# Altium PCB senoko_pvt1.PcbDoc (part 1 of 3)
Units mil, origin at the board's own origin, x right, y up, seen from the top; angles counter-clockwise.
Board outline 4901.58 x 1614.17 mil, 4 copper layers (Top Layer, Internal Plane 1, Internal Plane 2, Bottom Layer), stack 65.8 mil thick; 226 components, 139 nets, 941 pads, 366 vias.
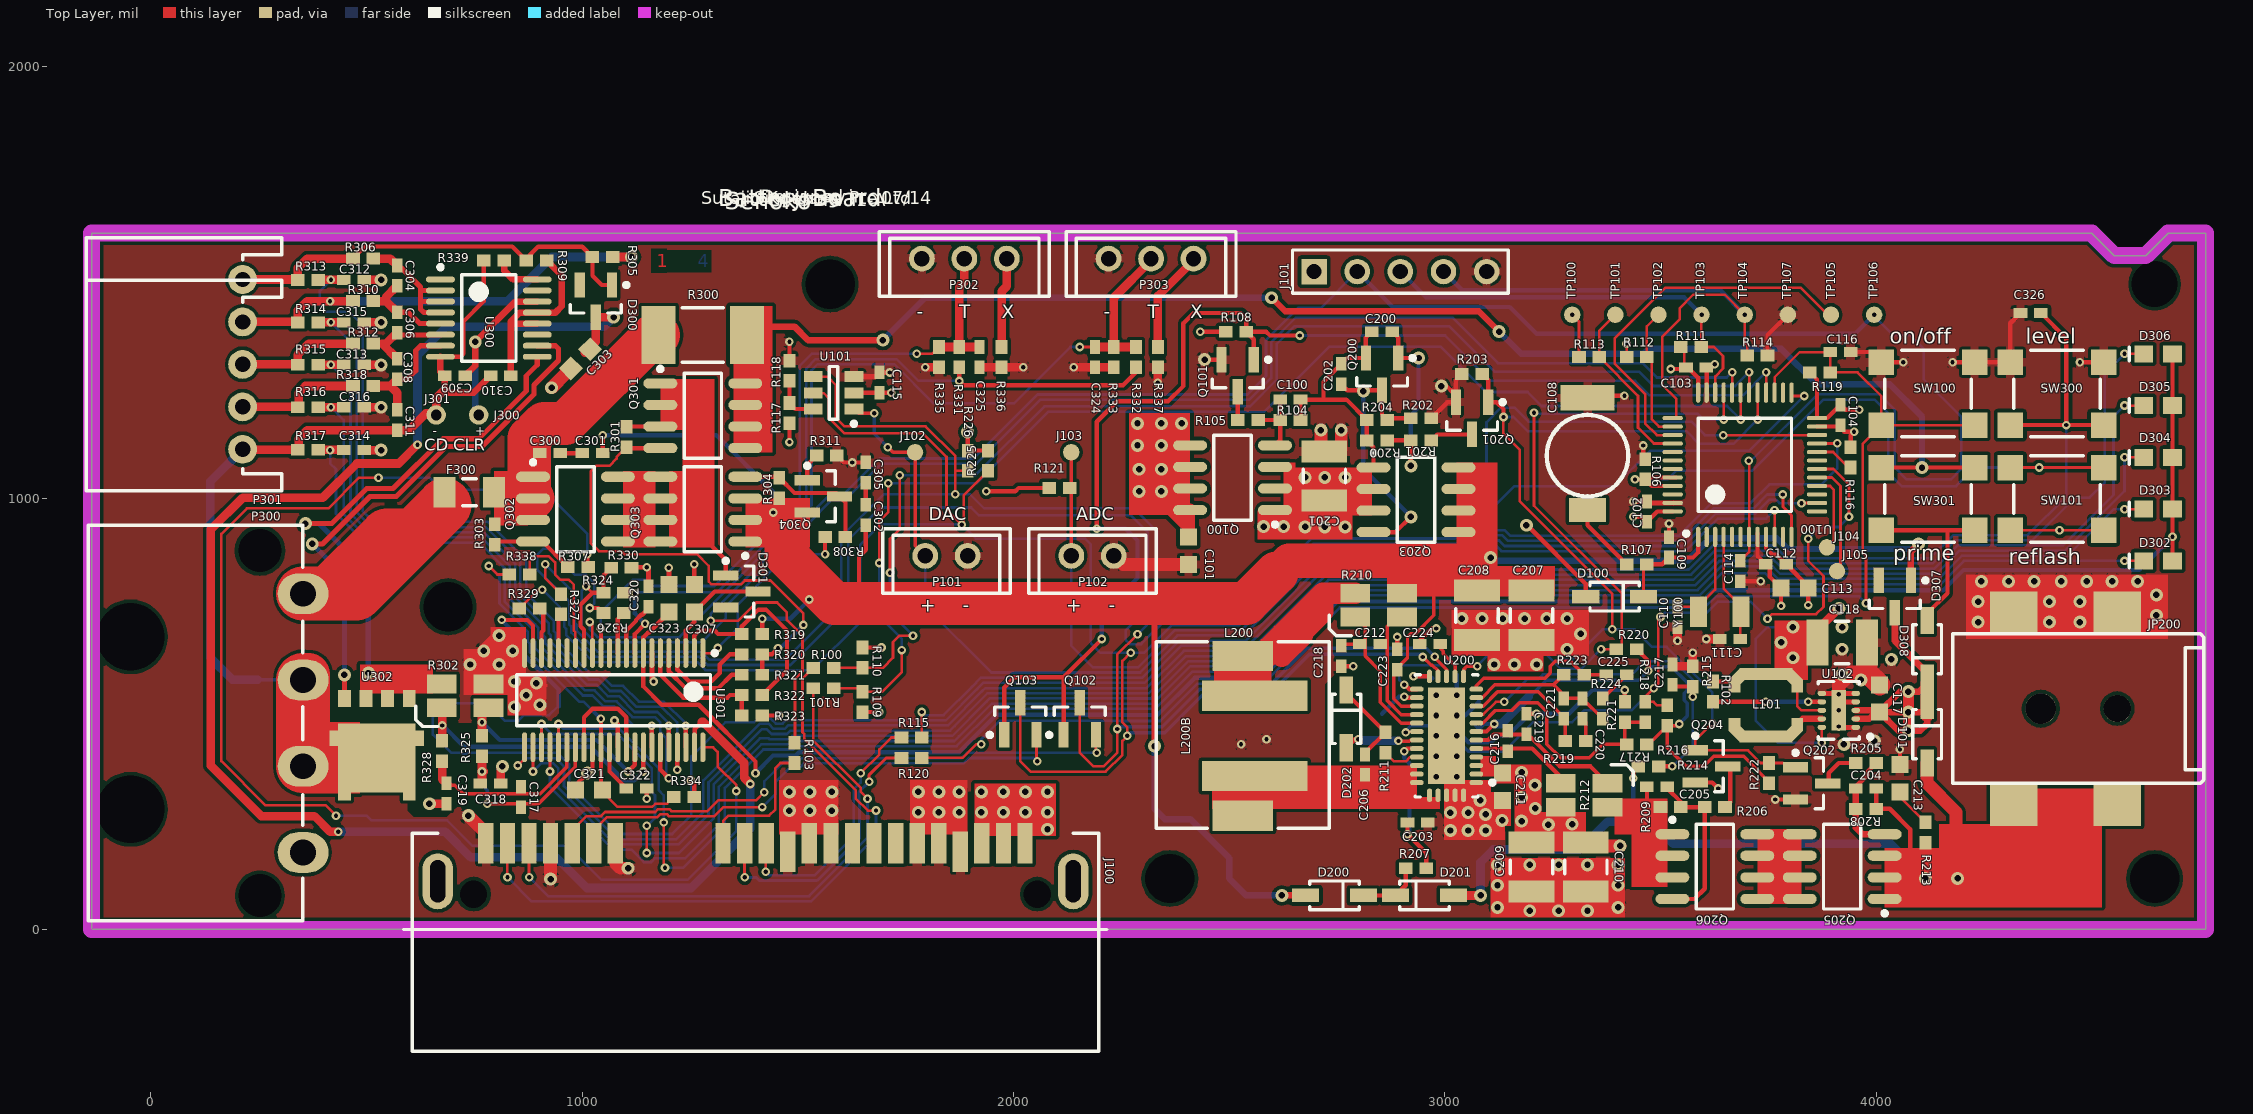
[diagram p0: Top Layer view]
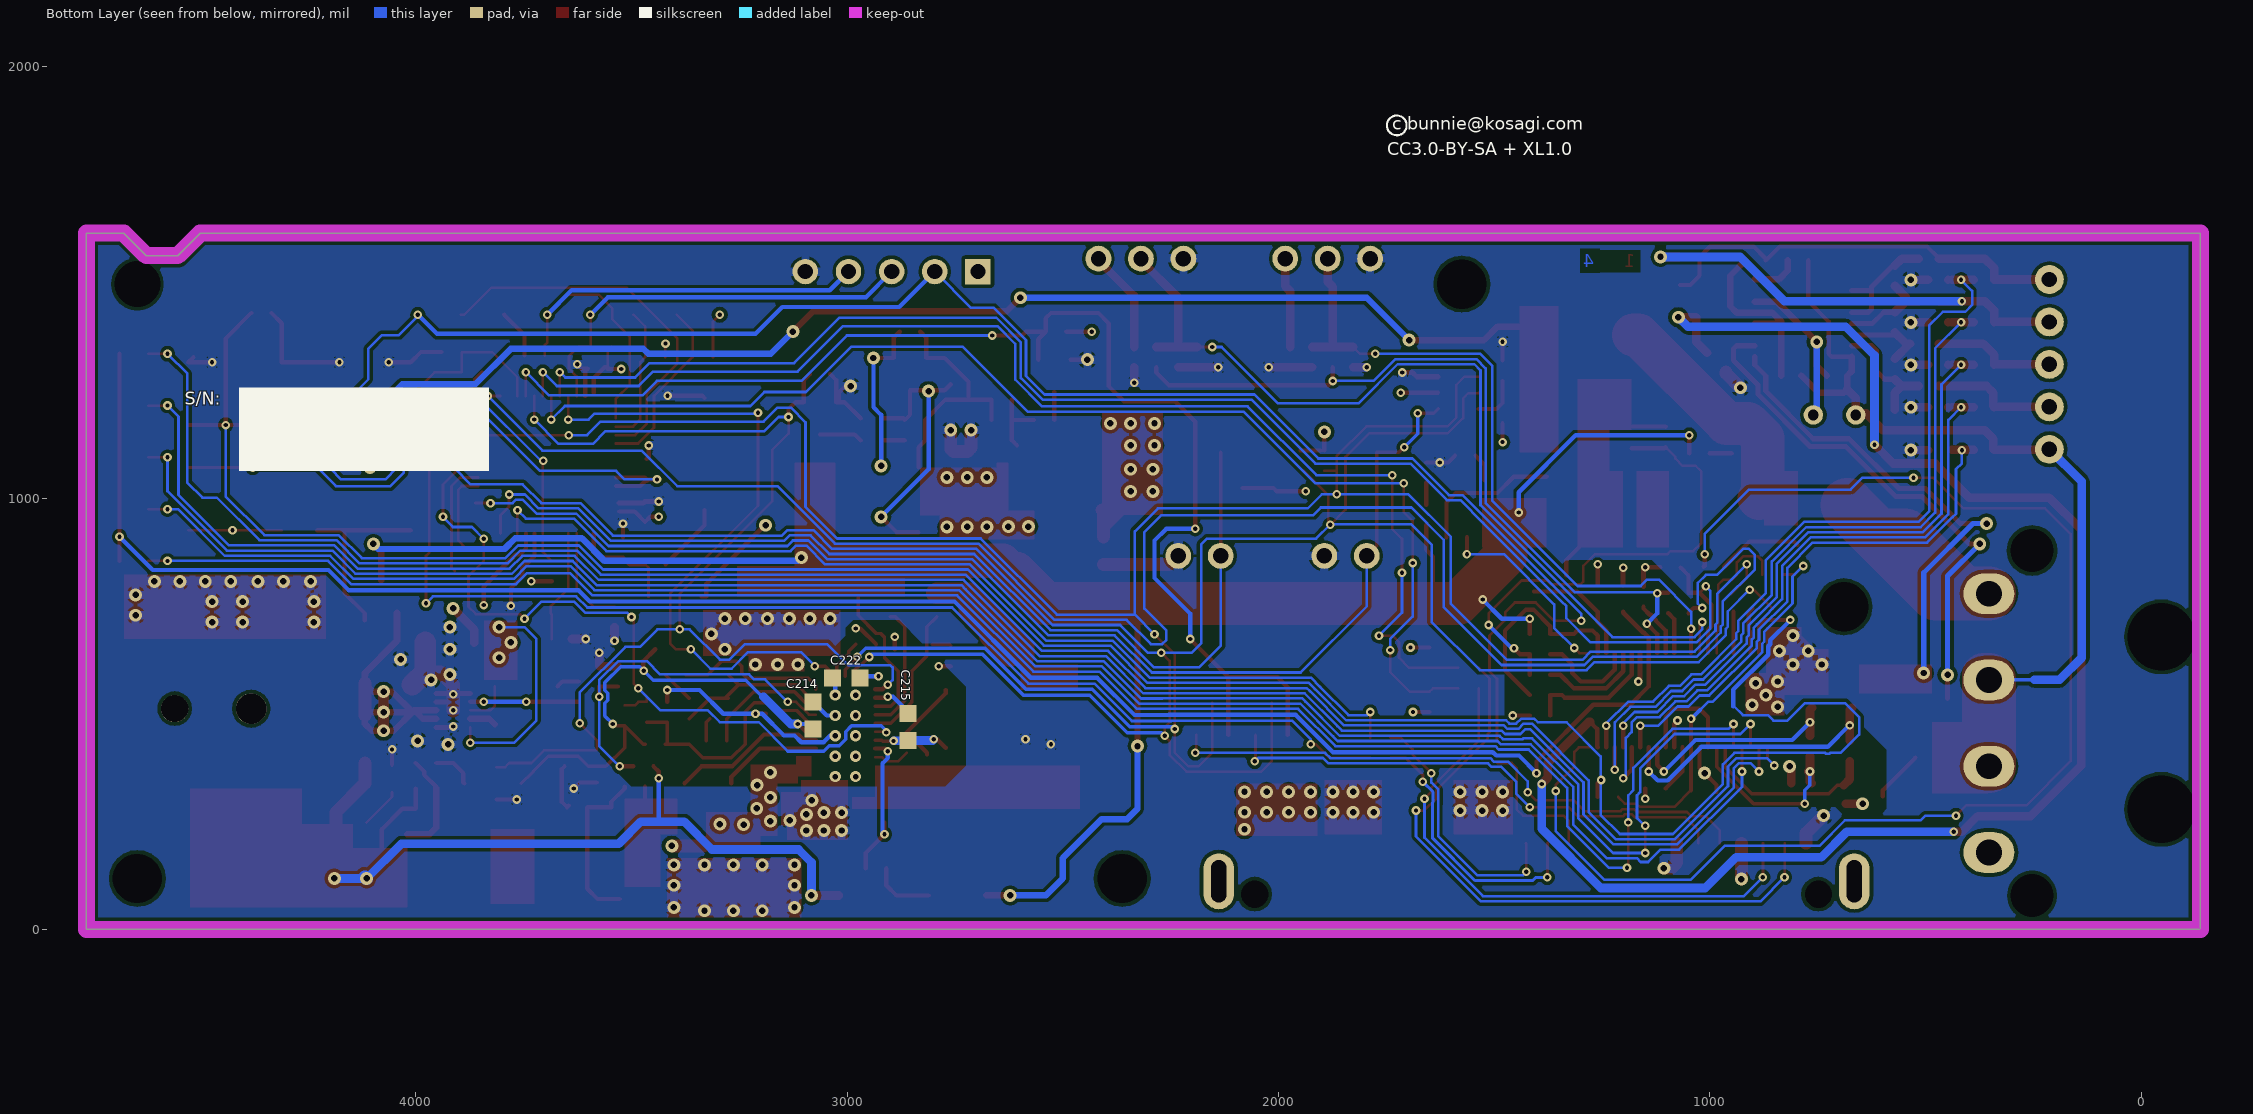
[diagram p1: Bottom Layer view, seen from below]
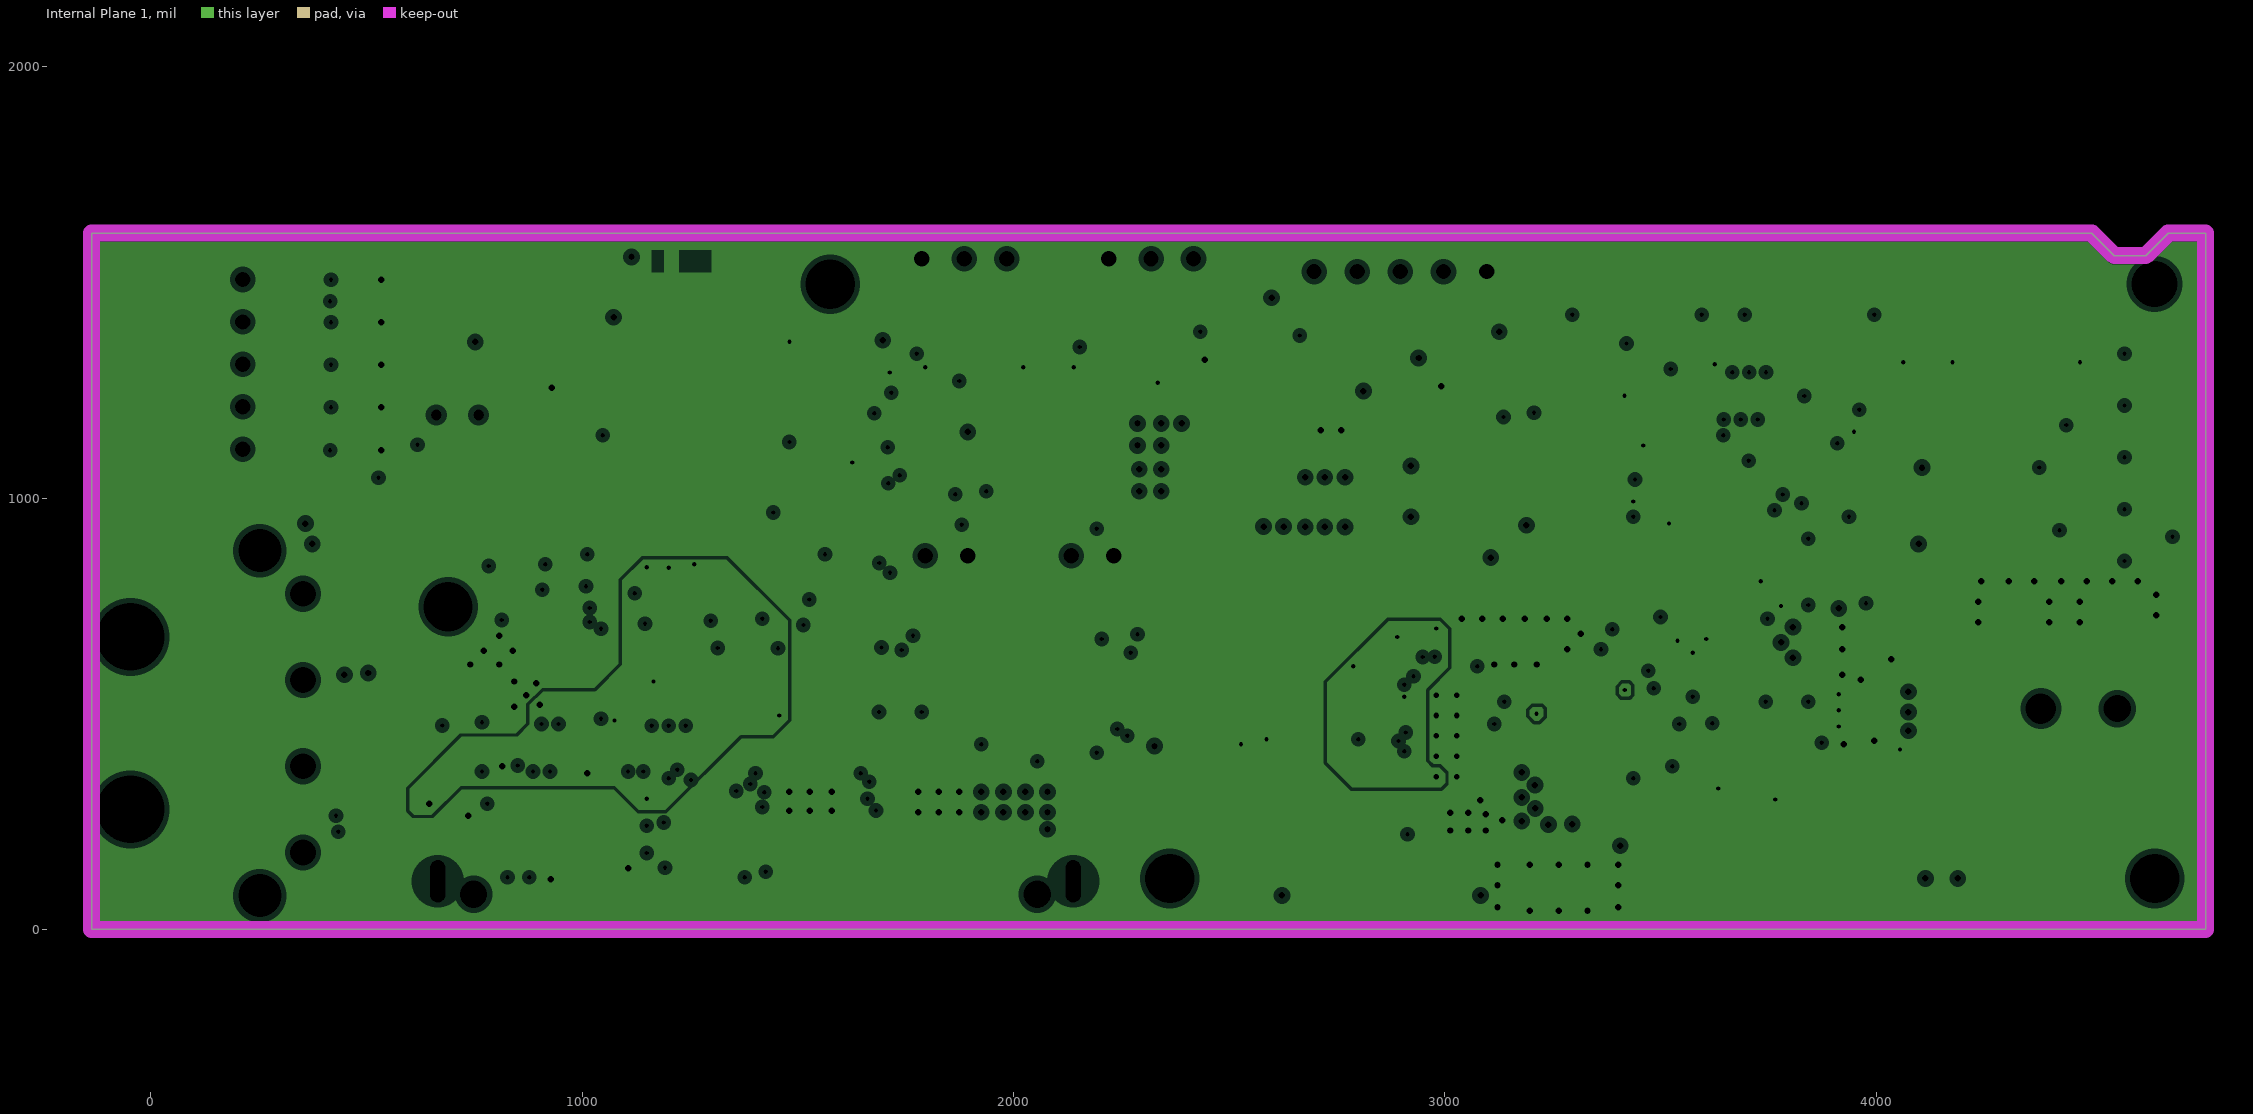
[diagram p2: Internal Plane 1, clearances drawn from the general rule]
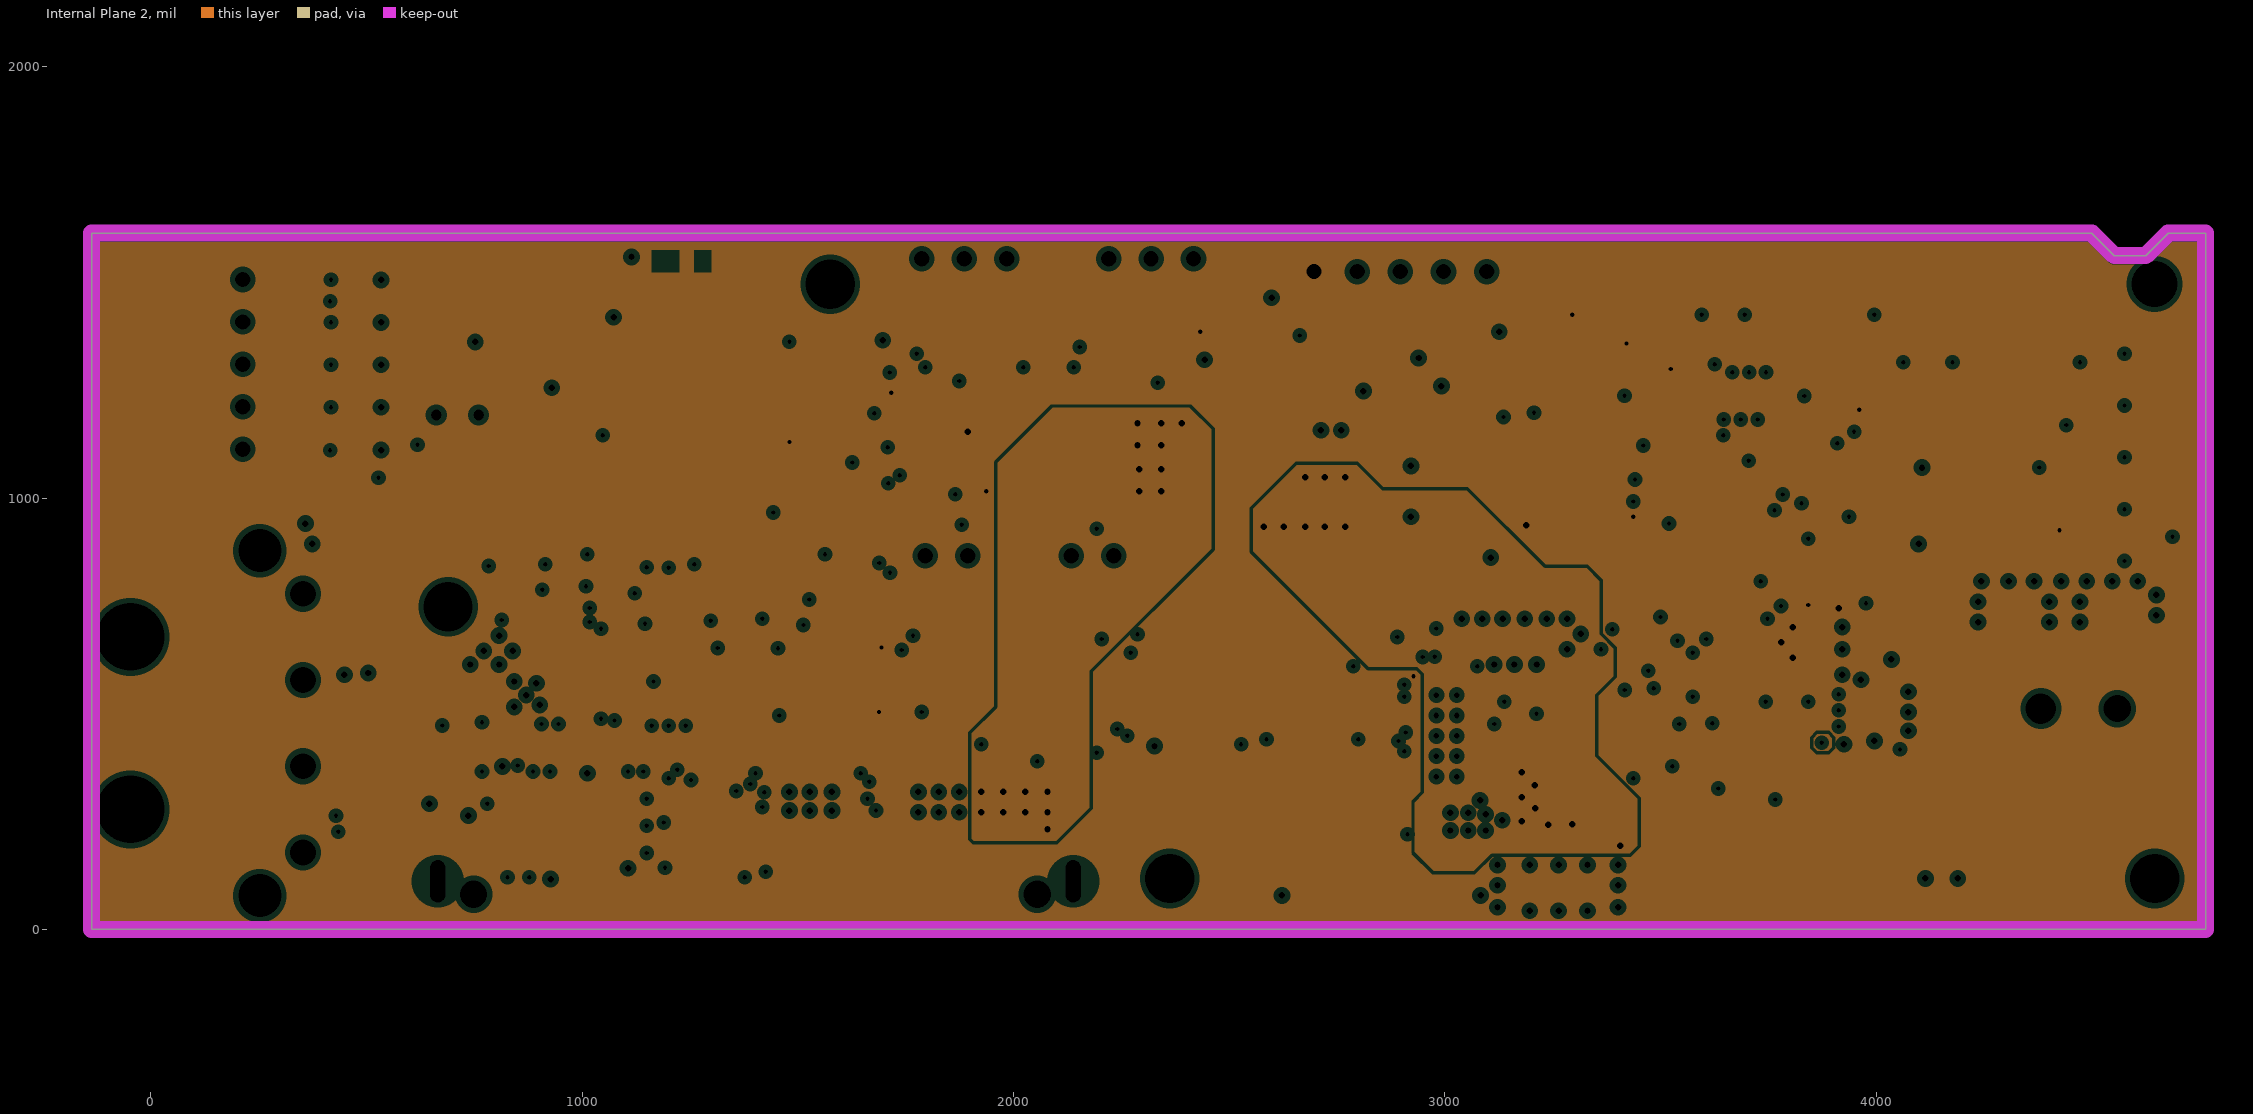
[diagram p3: Internal Plane 2, clearances drawn from the general rule]

## Layer stack, top to bottom
Top Solder: solder mask 0.4, Solder Resist, Dk 3.5
Top Layer: signal copper 1.4
Dielectric1: core 12.6, FR-4, Dk 4.8
Internal Plane 1: plane copper 1.4, net GND
Dielectric2: prepreg 35, FR-4, Dk 4.8
Internal Plane 2: plane copper 1.4, net (Multiple Nets)
Dielectric3: core 12.6, FR-4, Dk 4.8
Bottom Layer: signal copper 1.4
Bottom Solder: solder mask 0.4, Solder Resist, Dk 3.5

## Board outline
-137.8,0 -137.8,1614.17 4500,1614.17 4552.17,1562.01 4625,1562.01 4677.17,1614.17 4763.78,1614.17 4763.78,0

## Design rules (kind name [scope] priority, off if disabled: settings)
Clearance Clearance_poly [InPoly] p1: gap=8 ignorepadtopadclearanceinfootprint=FALSE except(0: Arc-Hole Track-Hole SMDPad-Hole THPad-Hole Via-Hole Fill-Hole Poly-Hole Region-Hole Text-Hole)
Clearance Clearance_NPTH [PadIsPlated = 'False'] p2: gap=12 ignorepadtopadclearanceinfootprint=FALSE except(0: Arc-Hole Track-Hole SMDPad-Hole THPad-Hole Via-Hole Fill-Hole Poly-Hole Region-Hole Text-Hole)
Clearance [All] p3: gap=6 ignorepadtopadclearanceinfootprint=FALSE except(0: Arc-Hole Track-Hole SMDPad-Hole THPad-Hole Via-Hole Fill-Hole Poly-Hole Region-Hole Text-Hole)
ComponentClearance [All] p1 off: gap=10 collisioncheckmode=3 verticalgap=10 showdistances=FALSE
Height [All] p1 off: minheight=0 maxheight=1000 prefheight=500
HoleSize [All] p1: absolutevalues=TRUE maxlimit=175 minlimit=1 maxpercent=80.000 minpercent=20.000
MinimumSolderMaskSliver [All] p1 off: minsoldermaskwidth=10
PlaneClearance PlaneClearance_M2.5 [(AsMM(HoleSize) = 2.9) or (AsMM(HoleSize) = 2.7)] p1: clearance=43.31
PlaneClearance [All] p2: clearance=12
PlaneConnect [All] p1: planeconnectstyle=Direct reliefexpansion=20 reliefentries=4 reliefconductorwidth=10 reliefairgap=10
PolygonConnect [All] p1: connectstyle=Relief reliefconductorwidth=20 reliefentries=4 polygonreliefangle="90 Angle" airgapwidth=6
RoutingVias [All] p1: holewidth=15 width=30 viastyle="Through Hole" minholewidth=10 minwidth=20 maxholewidth=15 maxwidth=30
SilkToSilkClearance [All] p1 off: silktosilkclearance=10
SilkToSolderMaskClearance SilkscreenOverComponentPads [IsPad] p1 off: minsilkscreentomaskgap=10 clearancetoexposedcopper=TRUE
SolderMaskExpansion [All] p1: expansion=2.76
Width [All] p1: maxlimit=200 minlimit=6 preferedwidth=8 minimp=50.000000 maximp=50.000000 favimp=50.000000
22 further rules are at their usual default settings.

## Components (designator, comment, footprint, x,y, rotation, side; value= is the part's Value field where it differs from the comment)
C100 "10nF, X7R, 50V 10%" CAPC1005N 2641.73,1228.35 r180 top
C101 "2.2uF, 25V, 10% X5R" CAPC1608N 2405.51,877.95 r270 top
C102 "0.1uF, 25V, X5R" CAPC1005N 3468.5,968.5 r90 top
C103 "0.1uF, 25V, X5R" CAPC1005N 3582.68,1303.15 r0 top
C104 "0.1uF, 25V, X5R" CAPC1005N 3917.32,1192.91 r270 top
C108 "0.06F 3.3V coin supercap" TAIYO_YUDEN_PAS414HR-VA5R 3330.71,1098.43 r90 top
C109 "0.1uF, 25V, X5R" CAPC1005N 3519.69,885.83 r90 top
C110 "6.8pF, NP0" CAPC1005N 3539.37,724.41 r270 top
C111 "6.8pF, NP0" CAPC1005N 3661.42,673.23 r180 top
C112 "10nF, X7R, 50V 10%" CAPC1005N 3767.72,846.46 r0 top
C113 "1.0uF, 25V, 20% X5R" CAPC1608N 3811.02,791.34 r0 top
C114 "0.1uF, 25V, X5R" CAPC1005N 3685.04,830.71 r270 top
C115 "0.1uF, 25V, X5R" CAPC1005N 1688.98,1267.72 r90 top
C116 "0.1uF, 25V, X5R" CAPC1005N 3917.32,1338.58 r180 top
C117 "2.2uF, 25V, 10% X5R" CAPC1608N 4007.87,535.43 r90 top
C118 "22uF, 25V, X5R, 10%" CAPC3225N 3921.26,665.35 r0 top
C200 "DNP" CAPC1005N 2854.33,1385.83 r180 top
C201 "22uF, 25V, X5R, 10%" CAPC3225N 2720.47,1051.18 r90 top
C202 "0.1uF, 25V, X5R" CAPC1005N 2759.84,1287.4 r270 top
C203 "0.1uF, 25V, X5R" CAPC1005N 2937.01,248.03 r0 top
C204 "0.1uF, 25V, X5R" CAPC1005N 3976.38,326.77 r0 top
C205 "10nF, X7R, 50V 10%" CAPC1005N 3492.13,330.71 r180 top
C206 "0.1uF, 25V, X5R" CAPC1005N 2814.96,381.89 r270 top
C207 "22uF, 25V, X5R, 10%" CAPC3225N 3200.79,728.35 r270 top
C208 "22uF, 25V, X5R, 10% (DNP)" CAPC3225N 3074.8,728.35 r270 top
C209 "22uF, 25V, X5R, 10%" CAPC3225N 3200.79,144.69 r270 top
C210 "22uF, 25V, X5R, 10% (DNP)" CAPC3225N 3326.77,144.69 r270 top
C211 "1.0uF, 25V, 20% X5R" CAPC1608N 3133.86,330.71 r270 top
C212 "0.1uF, 25V, X5R" CAPC1005N 2826.77,661.42 r180 top
C213 "2.2uF, 25V, 10% X5R" CAPC1608N 4055.12,350.39 r90 top
C214 "1.0uF, 25V, 20% X5R" CAPC1608N 3078.74,496.06 r90 bottom
C215 "1.0uF, 25V, 20% X5R" CAPC1608N 2859.25,469.49 r90 bottom
C216 "0.1uF, 25V, X5R" CAPC1005N 3145.67,437.01 r270 top
C217 "10nF, X7R, 50V 10%" CAPC1005N 3527.56,590.55 r90 top
C218 "0.1uF, 25V, X5R" CAPC1005N 2759.84,633.86 r90 top
C219 "0.1uF, 25V, X5R" CAPC1005N 3188.98,476.38 r90 top
C220 "2.2nF, X7R, 10%" CAPC1005N 3318.9,511.81 r90 top
C221 "51pF, NP0" CAPC1005N 3275.59,511.81 r90 top
C222 "1.0uF, 25V, 20% X5R" CAPC1608N 3001.97,582.68 r0 bottom
C223 "0.1uF, 25V, X5R" CAPC1005N 2889.76,625.98 r270 top
C224 "100pF, NP0" CAPC1005N 2965.55,661.42 r180 top
C225 "130pF, NP0" CAPC1005N 3397.64,590.55 r180 top
C300 "0.1uF, 25V, X5R" CAPC1005N 925.2,1104.33 r180 top
C301 "0.1uF, 25V, X5R" CAPC1005N 1023.62,1104.33 r180 top
C302 "0.1uF, 25V, X5R" CAPC1005N 1657.48,960.63 r270 top
C303 "1.0uF, 25V, 20% X5R" CAPC1608N 996.06,1322.83 r225 top
C304 "0.1uF, 25V, X5R" CAPC1005N 570.87,1515.75 r270 top
C305 "0.1uF, 25V, X5R" CAPC1005N 1657.48,1059.06 r270 top
C306 "0.1uF, 25V, X5R" CAPC1005N 570.87,1407.48 r270 top
C307 "1.0uF, 25V, 20% X5R" CAPC1608N 1259.84,767.72 r90 top
C308 "0.1uF, 25V, X5R" CAPC1005N 570.87,1299.21 r270 top
C309 "0.22uF, 25V, X5R" CAPC1005N 704.72,1283.46 r180 top
C310 "0.1uF, 25V, X5R" CAPC1005N 811.02,1283.46 r180 top
C311 "0.1uF, 25V, X5R" CAPC1005N 570.87,1181.1 r270 top
C312 "0.1uF, 25V, X5R" CAPC1005N 470.47,1505.91 r0 top
C313 "0.1uF, 25V, X5R" CAPC1005N 470.47,1309.06 r0 top
C314 "0.1uF, 25V, X5R" CAPC1005N 470.47,1111.22 r0 top
C315 "0.1uF, 25V, X5R" CAPC1005N 470.47,1407.48 r0 top
C316 "0.1uF, 25V, X5R" CAPC1005N 470.47,1210.63 r0 top
C317 "0.1uF, 25V, X5R" CAPC1005N 858.27,307.09 r90 top
C318 "0.1uF, 25V, X5R" CAPC1005N 787.4,338.58 r0 top
C319 "0.1uF, 25V, X5R" CAPC1005N 685.04,314.96 r270 top
C320 "0.1uF, 25V, X5R" CAPC1005N 1153.54,771.65 r90 top
C321 "1.0uF, 25V, 20% X5R" CAPC1608N 1015.75,322.83 r180 top
C322 "0.1uF, 25V, X5R" CAPC1005N 1125.98,326.77 r0 top
C323 "10uF, 10V, X5R, 20%" CAPC1608N 1200.79,767.72 r90 top
C324 "0.47uF, 16V, X5R" CAPC1005N 2188.98,1326.77 r270 top
C325 "0.47uF, 16V, X5R" CAPC1005N 1921.26,1326.77 r270 top
C326 "0.1uF, 25V, X5R" CAPC1005N 4358.27,1429.13 r180 top
D100 "BAT54T1G" SOD123 3393.7,771.65 r0 top
D101 "BAT54T1G" SOD123 4118.11,452.76 r90 top
D200 "BAT54T1G" SOD123 2744.09,78.74 r0 top
D201 "BAT54T1G" SOD123 2952.76,78.74 r180 top
D202 "BAT54T1G" SOD123 2771.65,488.19 r90 top
D300 "BAS16" SOT23-3N 1031.5,1456.69 r270 top
D301 "BAS16" SOT23-3N 1370.08,783.46 r0 top
D302 "APT1608SGC green" CD1608-0603 4653.54,854.33 r180 top
D303 "APT1608SGC green" CD1608-0603 4653.54,974.41 r180 top
D304 "APT1608SGC green" CD1608-0603 4653.54,1094.49 r180 top
D305 "APT1608SGC green" CD1608-0603 4653.54,1214.57 r180 top
D306 "APT1608SGC green" CD1608-0603 4653.54,1334.65 r180 top
D307 "BAS16" SOT23-3N 4043.31,771.65 r270 top
D308 "BAT54T1G" SOD123 4118.11,649.61 r270 top
F300 "Littlefuse 0437007.WR 7A 35V Fast Blow" RESC3216N 738.19,1013.78 r0 top
J100 "MOLEX 47018-2000 female" SATA_MOLEX_47018_2000 1401.57,81.69 r0 top
J101 "Male 2.54mm 5x1 header (DNP)" HDR1X5 2696.85,1525.2 r0 top
J102 "test point (DNP)" TP_SMT_38mil 1771.65,1106.3 r90 top
J103 "test point (DNP)" TP_SMT_38mil 2133.86,1106.3 r90 top
J104 "test point (DNP)" TP_SMT_38mil 3885.83,885.83 r180 top
J105 "test point (DNP)" TP_SMT_38mil 3909.45,830.71 r180 top
J300 "test point (DNP)" TP_HOLE 759.84,1192.91 r90 top
J301 "test point (DNP)" TP_HOLE 661.42,1192.91 r90 top
JP200 "2.1mm x 5.5mm DC jack" CUI_PJ_002AH_SMT 4381.89,511.81 r180 top locked
L101 "10uH LPS4018-103" COILCRAFT_LPS4018 3744.09,519.69 r90 top
L200 "3.3uH, MSS1260-332NL (DNP)" COILCRAFT_MSS1048 2531.5,263.78 r0 top
L200B "3.3uH, XAL7030-332MEC" COILCRAFT_XAL7030 2559.06,448.82 r90 top
P101 "JST B2B-EH-A" JST_B2B_EH_A 1795.28,866.14 r0 top
P102 "JST B2B-EH-A" JST_B2B_EH_A 2133.86,866.14 r0 top
P300 "Molex 15-24-4441" MOLEX_15-24-4441 -47.24,478.35 r90 top
P301 "JST S4B-XH-A" JST_S5B-XH-A_OPT4 212.6,1359.25 r90 top
P302 "JST B3B-EH-A" JST_B3B_EH_A 1787.4,1555.12 r0 top
P303 "JST B3B-EH-A" JST_B3B_EH_A 2220.47,1555.12 r0 top
Q100 "Si4435DY" SOIC127P600-8AN 2507.87,1047.24 r180 top
Q101 "BSS138" SOT23-3N 2519.69,1283.46 r270 top
Q102 "BSS138" SOT23-3N 2153.54,488.19 r90 top
Q103 "BSS138" SOT23-3N 2015.75,488.19 r90 top
Q200 "FDN304P" SOT23-3N 2854.33,1287.4 r270 top
Q201 "BSS138" SOT23-3N 3062.99,1185.04 r270 top
Q202 "BSS138" SOT23-3N 3850.39,338.58 r0 top
Q203 "Si4435DY" SOIC127P600-8AN 2933.07,996.06 r0 top
Q204 "BSS138" SOT23-3N 3618.11,377.95 r0 top
Q205 "Si4435DY" SOIC127P600-8AN 3921.26,145.67 r180 top
Q206 "Si4435DY" SOIC127P600-8AN 3625.98,145.67 r0 top
Q301 "Si4435DY" SOIC127P600-8AN 1279.53,1190.94 r0 top
Q302 "FDS6690A" SOIC127P600-8AN 984.25,974.41 r0 top
Q303 "FDS6690A" SOIC127P600-8AN 1279.53,974.41 r180 top
Q304 "BSS138" SOT23-3N 1559.06,1003.94 r0 top
R100 "330, 1%" RESC1005N 1559.06,606.3 r180 top value=100k
R101 "330, 1%" RESC1005N 1559.06,559.06 r180 top value=100k
R102 "100k, 1%" RESC1005N 3622.05,551.18 r270 top value=100k
R103 "330, 1%" RESC1005N 1492.13,409.45 r270 top value=100k
R104 "10k, 1%" RESC1005N 2641.73,1181.1 r0 top value=100k
R105 "10k, 1%" RESC1005N 2543.31,1181.1 r0 top value=100k
R106 "47k, 1%" RESC1005N 3464.57,1066.93 r270 top value=100k
R107 "1k, 1%" RESC1005N 3444.88,846.46 r0 top value=100k
R108 "100k, 1%" RESC1005N 2515.75,1385.83 r0 top value=100k
R109 "47k, 1%" RESC1005N 1649.61,527.56 r270 top value=100k
R110 "47k, 1%" RESC1005N 1649.61,629.92 r90 top value=100k
R111 "10k, 1%" RESC1005N 3570.87,1350.39 r180 top value=100k
R112 "10k, 1%" RESC1005N 3444.88,1326.77 r180 top value=100k
R113 "10k, 1%" RESC1005N 3334.65,1326.77 r180 top value=100k
R114 "10k, 1%" RESC1005N 3724.41,1330.71 r180 top value=100k
R115 "330, 1%" RESC1005N 1763.78,444.88 r180 top value=100k
R116 "10k, 1%" RESC1005N 3940.94,1094.49 r270 top value=100k
R117 "10k, 1% (DNP)" RESC1005N 1480.32,1196.85 r90 top value=100k
R118 "10k, 1%" RESC1005N 1480.32,1295.28 r90 top value=100k
R119 "47k, 1%" RESC1005N 3870.08,1291.34 r180 top value=100k
R120 "330, 1%" RESC1005N 1763.78,397.64 r180 top value=100k
R121 "4.7k, 1%" RESC1005N 2106.3,1023.62 r180 top value=100k
R200 "10k, 1%" RESC1005N 2842.52,1133.86 r0 top value=100k
R201 "20k, 1%" RESC1005N 2944.88,1133.86 r0 top value=100k
R202 "100k, 1%" RESC1005N 2944.88,1185.04 r0 top value=100k
R203 "1M, 1%" RESC1005N 3062.99,1287.4 r0 top value=100k
R204 "100k, 1%" RESC1005N 2842.52,1181.1 r0 top value=100k
R205 "10k, 1%" RESC1005N 3976.38,385.83 r180 top value=100k
R206 "10k, 1%" RESC1005N 3625.98,283.46 r180 top value=100k
R207 "10 ohm, 1%" RESC1005N 2933.07,141.73 r0 top value=100k
R208 "10k, 1%" RESC1005N 3976.38,279.53 r180 top value=100k
R209 "10k, 1%" RESC1005N 3523.62,283.46 r0 top value=100k
R210 "0.010 ohm, 1% kelvin, 50ppm" OHMITE_LVK_1206_KELVIN 2846.46,751.97 r0 top
R211 "3.9 ohm, 5%" RESC1005N 2862.2,433.07 r90 top value=100k
R212 "0.010 ohm, 1% kelvin, 50ppm" OHMITE_LVK_1206_KELVIN 3322.83,311.02 r180 top
R213 "3.9 ohm, 5%" RESC1005N 4114.17,224.41 r90 top value=100k
R214 "316k, 1%" RESC1005N 3472.44,377.95 r0 top value=100k
R215 "66.5k, 1%" RESC1005N 3574.8,586.61 r90 top value=100k
R216 "10k, 1%" RESC1005N 3515.75,496.06 r90 top value=100k
R217 "200k, 1%" RESC1005N 3444.88,429.13 r180 top value=100k
R218 "1.4M, 1%" RESC1005N 3464.57,503.94 r90 top value=100k
R219 "7.5k, 1%" RESC1005N 3303.15,437.01 r180 top value=100k
R220 "10k, 1%" RESC1005N 3421.26,649.61 r180 top value=100k
R221 "49.9k, 1%" RESC1005N 3417.32,503.94 r90 top value=100k
R222 "10k, 1%" RESC1005N 3751.97,362.2 r90 top value=100k
R223 "200k, 1%" RESC1005N 3299.21,590.55 r0 top value=100k
R224 "20k, 1%" RESC1005N 3366.14,511.81 r90 top value=100k
R225 "4.7k, 1%" RESC1005N 1940.94,1086.61 r270 top value=100k
R226 "4.7k, 1%" RESC1005N 1893.7,1086.61 r270 top value=100k
R300 "300, 5%, 1W" RESC6432N 1279.53,1377.95 r180 top value=100k
R301 "1M, 1%" RESC1005N 1102.36,1141.73 r90 top value=100k
R302 "0.010 ohm, 1% kelvin, 50ppm" OHMITE_LVK_1206_KELVIN 728.35,541.34 r0 top
R303 "3.01M, 1%" RESC1005N 797.24,915.35 r270 top value=100k
R304 "3.01M, 1%" RESC1005N 1456.69,1023.62 r270 top value=100k
R305 "0 ohm" RESC1005N 1047.24,1559.06 r180 top value=100k
R306 "1k, 1%" RESC1005N 492.13,1555.12 r0 top value=100k
R307 "5.1k, 1%" RESC1005N 990.16,840.55 r0 top value=100k
R308 "5.1k, 1%" RESC1005N 1586.61,909.45 r180 top value=100k
R309 "1k, 1%" RESC1005N 893.7,1551.18 r0 top value=100k
R310 "1k, 1%" RESC1005N 492.13,1456.69 r0 top value=100k
R311 "1M, 1%" RESC1005N 1566.93,1098.43 r0 top value=100k
R312 "1k, 1%" RESC1005N 492.13,1358.27 r0 top value=100k
R313 "100, 1%" RESC1005N 364.17,1505.91 r0 top value=100k
R314 "100, 1%" RESC1005N 364.17,1407.48 r0 top value=100k
R315 "100, 1%" RESC1005N 364.17,1309.06 r0 top value=100k
R316 "100, 1%" RESC1005N 364.17,1210.63 r0 top value=100k
R317 "100, 1%" RESC1005N 364.17,1112.2 r0 top value=100k
R318 "1k, 1%" RESC1005N 492.13,1259.84 r0 top value=100k
R319 "1k, 1%" RESC1005N 1393.7,685.04 r180 top value=100k
R320 "5.1k, 1%" RESC1005N 1393.7,637.8 r180 top value=100k
R321 "5.1k, 1% (DNP)" RESC1005N 1393.7,590.55 r180 top value=100k
R322 "100k, 1% (DNP)" RESC1005N 1393.7,543.31 r0 top value=100k
R323 "100k, 1%" RESC1005N 1393.7,496.06 r0 top value=100k
R324 "100k, 1%" RESC1005N 1072.83,780.51 r180 top value=100k
R325 "100, 1%" RESC1005N 767.72,425.2 r90 top value=100k
R326 "0 ohm" RESC1005N 1072.83,733.27 r180 top value=100k
R327 "0 ohm" RESC1005N 950.79,753.94 r90 top value=100k
R328 "100, 1%" RESC1005N 675.2,413.39 r90 top value=100k
R329 "0 ohm" RESC1005N 877.95,744.09 r180 top value=100k
R330 "1k, 1%" RESC1005N 1090.55,838.58 r0 top value=100k
R331 "8.45k, 1%" RESC1005N 1874.02,1326.77 r270 top value=100k
R332 "8.45k, 1%" RESC1005N 2283.46,1326.77 r270 top value=100k
R333 "61.9k, 1%" RESC1005N 2232.28,1326.77 r90 top value=100k
R334 "100k, 1%" RESC1005N 1236.22,307.09 r180 top value=100k
R335 "61.9k, 1%" RESC1005N 1826.77,1326.77 r90 top value=100k
R336 "10k, 1%" RESC1005N 1972.44,1326.77 r90 top value=100k
R337 "10k, 1%" RESC1005N 2334.65,1326.77 r90 top value=100k
R338 "5.1k, 1%" RESC1005N 854.33,822.83 r0 top value=100k
R339 "1k, 1% (DNP)" RESC1005N 795.28,1551.18 r180 top value=100k
SW100 "TL3342F160QG/TR" SWITCH_TS-1187A 4011.81,1169.29 r90 top
SW101 "TL3342F160QG/TR" SWITCH_TS-1187A 4311.02,925.2 r90 top
SW300 "TL3342F160QG/TR" SWITCH_TS-1187A 4527.56,1314.96 r270 top
SW301 "TL3342F160QG/TR" SWITCH_TS-1187A 4228.35,1070.87 r270 top
TP100 "38mil SMT pad" TP_SMT_38mil 3295.28,1425.2 r90 top
TP101 "38mil SMT pad" TP_SMT_38mil 3395.28,1425.2 r90 top
TP102 "38mil SMT pad" TP_SMT_38mil 3495.28,1425.2 r90 top
TP103 "38mil SMT pad" TP_SMT_38mil 3595.28,1425.2 r90 top
TP104 "38mil SMT pad" TP_SMT_38mil 3695.28,1425.2 r90 top
TP105 "38mil SMT pad" TP_SMT_38mil 3895.28,1425.2 r90 top
TP106 "38mil SMT pad" TP_SMT_38mil 3995.28,1425.2 r90 top
TP107 "38mil SMT pad" TP_SMT_38mil 3795.28,1425.2 r90 top
U100 "STM32F101C8T6" TSQFP50P900X900-48N 3695.53,1077.31 r90 top
U101 "DAC081C081CIMK" SOT26A-6N 1582.68,1244.09 r180 top
U102 "TPS62177DQCT" TI_DQC_R_PWSON_N10 3913.39,507.87 r180 top
U200 "BQ24765RUV" TI_R-PVQFN-N34 3003.94,448.82 r180 top
U300 "bq77PL157A4225" TSOP65P640-16AN 783.46,1417.32 r0 top
U301 "BQ20Z95DBT" TSSOP50P640-44N 1072.83,531.5 r270 top
U302 "NTMFS4C35NT1G" ONSEMI_DFN5_5x6_1.27P 523.62,425.2 r0 top
Y100 "Abracon ABS07-120-32.768KHZ-T 6pF CL" ABS07-120 3637.8,736.22 r180 top

## Footprints (in the part's own frame and the unit in brackets; to place one, negate y for a bottom-side part, rotate by r counter-clockwise, add the part's x,y. Pads: shape width x height; smd on the part's side, far side on the other; paste and mask are expansions set on the pad)
ABS07-120 [mm] "32.768kHz SMD low-ESR"
  rect 1x1.8 smd: 1(-1.25,0) 2(1.25,0)
  body extent -1.6,-0.75 1.6,0.75, height 0.9
CAPC1005N [mm] "Chip Capacitor, Body 1.0x0.5mm, IPC Medium Density"
  rect 0.8x0.6 smd: 1(-0.6,0) 2(0.6,0)
  body extent -0.55,-0.3 0.55,0.3, height 0.6
CAPC1608N [mm] "Chip Capacitor, Body 1.6x0.8mm, IPC Medium Density"
  rect 1x1 smd: 1(-0.8,0) 2(0.8,0)
  body extent -0.88,-0.48 0.87,0.48, height 0.85
CAPC3225N [mm] "Chip Capacitor, Body 3.2x2.5mm, IPC Medium Density"
  rect 1.3x2.7 smd: 1(-1.45,0) 2(1.45,0)
  silkscreen extent -0.4,-1.25 0.4,1.25, body extent -1.7,-1.35 1.7,1.35, height 1.35
CD1608-0603 [mm] "Chip Diode; Body 1.6 x 0.8 mm (LxW typ)"
  rect 1.1x1 smd: 1(-0.85,0) 2(0.85,0)
  silkscreen extent 1.7,-0.4 1.7,0.4
COILCRAFT_LPS4018 [mm] "Coilcraft SMT power inductor, shielded, high current"
  rect 0.7x3.124 smd mask+0.07: 1(-1.85,0) 2(1.85,0)
  rect 0.7x1 smd rot 135 mask+0.07: 1(-1.6,1.6) 2(1.6,-1.6)
  rect 0.7x1 smd rot 45 mask+0.07: 1(-1.6,-1.6) 2(1.6,1.6)
  rect 0.75x0.7 smd mask+0.07: 1(-1.125,1.85) 1(-1.125,-1.85) 2(1.125,1.85) 2(1.125,-1.85)
  body extent -2.05,-2.05 2.05,2.05, height 1.8
COILCRAFT_MSS1048 [mm] "Coilcraft shielded power inductor"
  rect 3.56x1.78 smd mask+0.075: 1(0,0) 2(0,9.4)
  silkscreen extent -5.1,-0.75 5.1,10.25
COILCRAFT_XAL7030 [mm] "XAL7030 inductor"
  rect 1.78x6.22 smd: 1(-2.36,0) 2(2.36,0)
  body extent -4,-4 4,4, height 3.1
CUI_PJ_002AH_SMT [mm] "SMT 2.1mmx5.5mm ID (P-5) connector"
  round 1.6 hole 1.6 unplated: 0(-4.5,0)
  round 1.8 hole 1.8 unplated: 0(0,0)
  rect 2.8x2.4 smd: 1(-4.5,5.7) 1(1.6,5.7) 2(-4.5,-5.7) 3(1.6,-5.7)
  silkscreen extent -9.6,-4.4 5.2,4.4, body extent -9.5,-6.3 5.3,6.3, height 11.19
HDR1X5 [mm] "Connector; Header; 5 Position"
  rect 1.5x1.5 hole 0.9: 1(0,0)
  round 1.5 hole 0.9: 2(2.54,0) 3(5.08,0) 4(7.62,0) 5(10.16,0)
  silkscreen extent -1.27,-1.27 11.43,1.27
JST_B2B_EH_A [mil] "2-pin 2.5mm low cost connector"
  round 60 hole 35.43: 1(0,0) 2(98.42,0)
  silkscreen extent -98,-87 197,63, body extent -98,-87 197,63, height 236
JST_B3B_EH_A [mil] "3-pin 2.5mm low cost connector"
  round 60 hole 35.43: 1(0,0) 2(98.43,0) 3(196.85,0)
  silkscreen extent -98,-87 295,63, body extent -98,-87 295,63, height 236
JST_S5B-XH-A_OPT4 [mm] "JST 5-pin 2.5mm RA male connector with 4-pin stuff option"
  round 1.7 hole 0.9 mask+0.07: 1(3.75,0) 2(1.25,0) 3(-1.25,0) 4(-3.75,0) 5(-6.25,0)
  silkscreen extent -8.7,-2.3 6.2,9.2, body extent -8.7,-2.3 6.2,9.2, height 6.1
MOLEX_15-24-4441 [mm] "4-pin classic PC disk drive power connector, RA"
  round 2.4 hole 2.54 unplated mask+0.07: 0(-10.16,-7.62) 0(10.16,-7.62)
  round 2.4 hole 3.99 unplated mask+0.07: 0(-5.08,0) 0(5.08,0)
  oval 2.4x3 hole 1.52 mask+0.07: 1(7.62,-10.16) 2(2.54,-10.16) 3(-2.54,-10.16) 4(-7.62,-10.16)
  silkscreen extent -11.65,-10.15 11.65,2.5, body extent -11.62,-10.88 11.65,2.78, height 8.79
OHMITE_LVK_1206_KELVIN [mm] "4-terminal kelvin sense resistor, 1206 package"
  rect 1.75x1.1 smd mask+0.07: 1(-1.375,-0.7) 2(-1.375,0.7) 3(1.375,0.7) 4(1.375,-0.7)
  silkscreen extent -2.9,-1.8 -1.6,-0.6, body extent -1.6,-0.8 1.6,0.8, height 0.65
ONSEMI_DFN5_5x6_1.27P [mm] "DFN 5x6 package, power FET"
  rect 0.75x1 smd mask+0.07: 1(1.905,2.795) 2(0.635,2.795) 3(-0.635,2.795) 4(-1.905,2.795)
  rect 0.495x0.905 smd mask+0.07: 5(-2.528,0.453) 8(2.528,0.453)
  rect 0.75x0.475 smd mask+0.07: 6(-1.905,-2.963) 7(1.905,-2.963)
  rect 4.56x4.055 smd paste-3 mask+0.07: 9(0,-0.697)
  body extent -2.42,-3 2.48,2.8, height 1.1
RESC1005N [mm] "Chip Resistor, Body 1.1x0.5mm, IPC Medium Density"
  rect 0.8x0.7 smd: 1(-0.6,0) 2(0.6,0)
  body extent -0.55,-0.3 0.55,0.3, height 0.4
RESC3216N [mm] "Chip Resistor, Body 3.2x1.6mm, IPC Medium Density"
  rect 1.3x1.8 smd: 1(-1.45,0) 2(1.45,0)
  silkscreen extent -0.4,-0.8 0.4,0.8, body extent -1.68,-0.87 1.68,0.87, height 0.71
RESC6432N [mm] "Chip Resistor, Body 6.4x3.2mm, IPC Medium Density"
  rect 2x3.4 smd: 1(-2.6,0) 2(2.6,0)
  silkscreen extent -1.2,-1.6 1.2,1.6, body extent -3.3,-1.7 3.3,1.7, height 1.2
SATA_MOLEX_47018_2000 [mm] "SATA docking connector, top mount type"
  oval 1.8x3.3 hole 0.9 slot 2.5 at 90 deg mask+0.07: 0(-18.71,0.76) 0(18.71,0.76)
  round 1 hole 1.6 unplated mask+0.07: 0(-16.595,0) 0(16.595,0)
  rect 0.9x2.4 smd mask+0.07: 1(15.875,3) 2(14.605,3) 3(13.335,3) 4(12.065,2.5) 5(10.795,3) 6(9.525,3) 7(8.255,3) 8(6.985,3) 9(5.715,3) 10(4.445,3) 11(3.175,3) 12(1.905,2.5) 13(0.635,3) 14(-0.635,3) 15(-1.905,3) 16(-8.255,3) 17(-9.525,3) 18(-10.795,3) 19(-12.065,3) 20(-13.335,3) 21(-14.605,3) 22(-15.875,3)
  silkscreen extent -20.73,-9.25 20.7,3.57, body extent -20.19,-9.28 20.24,3.59, height 4.35
SOD123 [mm] "SOD-123; 2 Leads; Body 2.7 x 1.6 mm, (LxW)"
  rect 1.6x0.8 smd: 1(-1.7,0) 2(1.7,0)
  silkscreen extent -1.45,-0.85 1.45,0.85
SOIC127P600-8AN [mm] "SOIC, 8-Leads, Body 4.9x3.9mm, Pitch 1.27mm, IPC Medium Density"
  oval 2x0.6 smd: 1(-2.5,1.905) 2(-2.5,0.635) 3(-2.5,-0.635) 4(-2.5,-1.905) 5(2.5,-1.905) 6(2.5,-0.635) 7(2.5,0.635) 8(2.5,1.905)
  silkscreen extent -2.63,-2.5 1.1,2.88, body extent -2,-2.5 2,2.5, height 2.72
SOT23-3N [mm] "SOT23, 3-Leads, Body 2.9x1.3mm, Pitch 0.95mm, Lead Span 2.5mm, IPC Medium Density"
  rect 1.5x0.6 smd: 1(-0.95,0.95) 2(-0.95,-0.95) 3(0.95,0)
  silkscreen extent -1.07,-1.5 0.7,1.93, body extent -0.7,-1.5 0.7,1.5, height 1.1
SOT26A-6N [mm] "SOT23, 6-Leads, Body 2.9x1.7mm, Pitch 0.95mm, Lead Span 2.8mm, IPC Medium Density"
  rect 1.1x0.65 smd: 1(-1.2,0.95) 2(-1.2,0) 3(-1.2,-0.95) 4(1.2,-0.95) 5(1.2,0) 6(1.2,0.95)
  silkscreen extent -1.33,-1.55 0.25,1.95, body extent -0.9,-1.55 0.9,1.55, height 1.45
SWITCH_TS-1187A [mm] "TS-1187A tact switch, Chi Fung Electronics"
  rect 1.5x1.5 smd mask+0.07: 1(0,0) 2(0,-5.5) 3(3.7,0) 4(3.7,-5.5)
  silkscreen extent -0.7,-5.3 4.4,-0.2, body extent -0.7,-5.3 4.4,-0.2, height 1.6
TAIYO_YUDEN_PAS414HR-VA5R [mm] "Taiyo Yuden Supercap"
  rect 1.4x2.2 smd: 1(-3.2,0)
  rect 1.5x3.2 smd: 2(3.4,0)
  silkscreen extent -2.4,-2.4 2.4,2.4, body extent -2.36,-2.39 2.42,2.4, height 1.4
TI_DQC_R_PWSON_N10 [mm] "TI Plastic small outline no-lead 10 pins with power pad"
  oval 0.5x0.3 smd mask+0.07: 1(-1,1) 2(-1,0.5) 3(-1,0) 4(-1,-0.5) 5(-1,-1) 6(1,-1) 7(1,-0.5) 8(1,0) 9(1,0.5) 10(1,1)
  rect 0.84x2.4 smd mask+0.07: 11(0,0)
  silkscreen extent -1.98,-1.7 1.2,1.7, body extent -1.05,-1.55 1.05,1.55, height 0.8
TI_R-PVQFN-N34 [mm] "34-pin QFN (from TI datasheet)"
  oval 0.8x0.3 smd mask+0.07: 1(-1.75,2.75) 2(-1.75,2.25) 3(-1.75,1.75) 4(-1.75,1.25) 5(-1.75,0.75) 6(-1.75,0.25) 7(-1.75,-0.25) 8(-1.75,-0.75) 9(-1.75,-1.25) 10(-1.75,-1.75) 11(-1.75,-2.25) 12(-1.75,-2.75) 18(1.75,-2.75) 19(1.75,-2.25) 20(1.75,-1.75) 21(1.75,-1.25) 22(1.75,-0.75) 23(1.75,-0.25) 24(1.75,0.25) 25(1.75,0.75) 26(1.75,1.25) 27(1.75,1.75) 28(1.75,2.25) 29(1.75,2.75)
  oval 0.3x0.8 smd mask+0.07: 13(-1,-3.5) 14(-0.5,-3.5) 15(0,-3.5) 16(0.5,-3.5) 17(1,-3.5) 30(1,3.5) 31(0.5,3.5) 32(0,3.5) 33(-0.5,3.5) 34(-1,3.5)
  rect 2.2x5.7 smd mask+0.07: 35(0,0)
  silkscreen extent -2.83,-3.6 1.85,3.6, body extent -1.83,-3.57 1.83,3.58, height 1
TP_HOLE [mil] "Bare wire test point hole"
  round 45 hole 25: 1(0,0)
TP_SMT_38mil [mil] "38 mil round test point, SMT"
  round 38 smd: 1(0,0)
TSOP65P640-16AN [mm] "TSOP, 16-Leads, Body 5x4.4mm, Pitch 0.65mm, IPC Medium Density"
  oval 1.7x0.35 smd: 1(-2.85,2.275) 2(-2.85,1.625) 3(-2.85,0.975) 4(-2.85,0.325) 5(-2.85,-0.325) 6(-2.85,-0.975) 7(-2.85,-1.625) 8(-2.85,-2.275) 9(2.85,-2.275) 10(2.85,-1.625) 11(2.85,-0.975) 12(2.85,-0.325) 13(2.85,0.325) 14(2.85,0.975) 15(2.85,1.625) 16(2.85,2.275)
  silkscreen extent -2.97,-2.55 1.6,3.12, body extent -2.25,-2.55 2.25,2.55, height 1.1
TSQFP50P900X900-48N [mm] "Thin QFP, 48-Leads, Body 7x7mm, Pitch 0.5mm, IPC Medium Density"
  oval 1.2x0.25 smd: 1(-4.25,2.75) 2(-4.25,2.25) 3(-4.25,1.75) 4(-4.25,1.25) 5(-4.25,0.75) 6(-4.25,0.25) 7(-4.25,-0.25) 8(-4.25,-0.75) 9(-4.25,-1.25) 10(-4.25,-1.75) 11(-4.25,-2.25) 12(-4.25,-2.75) 25(4.25,-2.75) 26(4.25,-2.25) 27(4.25,-1.75) 28(4.25,-1.25) 29(4.25,-0.75) 30(4.25,-0.25) 31(4.25,0.25) 32(4.25,0.75) 33(4.25,1.25) 34(4.25,1.75) 35(4.25,2.25) 36(4.25,2.75)
  oval 0.25x1.2 smd: 13(-2.75,-4.25) 14(-2.25,-4.25) 15(-1.75,-4.25) 16(-1.25,-4.25) 17(-0.75,-4.25) 18(-0.25,-4.25) 19(0.25,-4.25) 20(0.75,-4.25) 21(1.25,-4.25) 22(1.75,-4.25) 23(2.25,-4.25) 24(2.75,-4.25) 37(2.75,4.25) 38(2.25,4.25) 39(1.75,4.25) 40(1.25,4.25) 41(0.75,4.25) 42(0.25,4.25) 43(-0.25,4.25) 44(-0.75,4.25) 45(-1.25,4.25) 46(-1.75,4.25) 47(-2.25,4.25) 48(-2.75,4.25)
  silkscreen extent -4.17,-2.75 2.75,3.57, body extent -4.5,-4.5 4.5,4.5, height 1.42
TSSOP50P640-44N [mm] "TSSOP, 44-Leads, Body 11x4.4mm, Pitch 0.5mm, IPC Medium Density"
  oval 1.75x0.3 smd: 1(-2.775,5.25) 2(-2.775,4.75) 3(-2.775,4.25) 4(-2.775,3.75) 5(-2.775,3.25) 6(-2.775,2.75) 7(-2.775,2.25) 8(-2.775,1.75) 9(-2.775,1.25) 10(-2.775,0.75) 11(-2.775,0.25) 12(-2.775,-0.25) 13(-2.775,-0.75) 14(-2.775,-1.25) 15(-2.775,-1.75) 16(-2.775,-2.25) 17(-2.775,-2.75) 18(-2.775,-3.25) 19(-2.775,-3.75) 20(-2.775,-4.25) 21(-2.775,-4.75) 22(-2.775,-5.25) 23(2.775,-5.25) 24(2.775,-4.75) 25(2.775,-4.25) 26(2.775,-3.75) 27(2.775,-3.25) 28(2.775,-2.75) 29(2.775,-2.25) 30(2.775,-1.75) 31(2.775,-1.25) 32(2.775,-0.75) 33(2.775,-0.25) 34(2.775,0.25) 35(2.775,0.75) 36(2.775,1.25) 37(2.775,1.75) 38(2.775,2.25) 39(2.775,2.75) 40(2.775,3.25) 41(2.775,3.75) 42(2.775,4.25) 43(2.775,4.75) 44(2.775,5.25)
  silkscreen extent -2.9,-5.7 1.5,6.08, body extent -2.25,-5.7 2.25,5.7, height 1.2

## Part data
C100 C101 C102 C103 C104 C109 C112 C113 C114 C115 C116 C117 C118 C200 C201 C202 C203 C204 C205 C206 C207 C208 C209 C210 C211 C212 C213 C214 C215 C216 C217 C218 C219 C220 C221 C222 C223 C224 C225 C300 C301 C302 C303 C304 C305 C306 C307 C308 C309 C310 C311 C312 C313 C314 C315 C316 C317 C318 C319 C320 C321 C322 C323 C324 C325 C326: library part "Cap Semi", "Capacitor (Semiconductor SIM Model)"
  C100 C101 C102 C103 C104 C109 C112 C113 C114 C116 C117 C118 C200 C201 C202 C203 C204 C205 C206 C207 C208 C209 C210 C211 C212 C213 C214 C215 C216 C217 C218 C219 C220 C221 C222 C223 C224 C225 C300 C301 C302 C303 C304 C305 C306 C307 C308 C309 C310 C311 C312 C313 C314 C315 C316 C317 C318 C319 C320 C321 C322 C323 C324 C325 C326: LatestRevisionDate=17-Jul-2002, LatestRevisionNote="Re-released for DXP Platform.", PackageReference=C1206, Published=8-Jun-2000, Publisher="Altium Limited"
C108: library part "Cap Pol3", "Taiyo Yuden PAS414HR-VA5R", LatestRevisionDate=17-Jul-2002, LatestRevisionNote="Re-released for DXP Platform.", PackageReference=C0805, Published=8-Jun-2000, Publisher="Altium Limited"
C110 C111: library part "CAP NP", Bottom=10, Right=20
D100 D101 D200 D201 D202 D308: library part "D Schottky", "Schottky Diode", Code - JEDEC=DO-214-AA, Published=8-Jun-2000, Publisher="Altium Limited", Revision="July-2002: Re-released for DXP Platform."
D300 D301 D307: library part "Diode 1N4148", "Silicon diode", Code_JEDEC=DO-204-AH, ComponentLink1Description="Manufacturer Link", ComponentLink1URL=http://www.fairchildsemi.com/, ComponentLink2Description=Datasheet, ComponentLink2URL=http://www.fairchildsemi.com/ds/1N%2F1N4148.pdf, DatasheetVersion=1997, LatestRevisionDate=17-Jul-2002, LatestRevisionNote="Re-released for DXP Platform.", PackageDescription="Diode, Axial; Body 3.8 x 1.9 mm (LxDia. max), Lead Dia. 0.53 mm (max)", PackageReference=DO-35, Published=8-Jun-2000, Publisher="Altium Limited"
D302 D303 D304 D305 D306: library part LED2, "Typical RED, GREEN, YELLOW, AMBER GaAs LED", LatestRevisionDate=17-Jul-2002, LatestRevisionNote="Re-released for DXP Platform.", PackageReference=3.2X1.6X1.1, PackageVersion=Feb-2002, Published=8-Jun-2000, Publisher="Altium Limited"
F300: library part "Fuse Thermal", "Thermal Fuse", Published=24-Mar-1999, Publisher="Altium Limited", Revision="July-2002: Re-released for DXP Platform."
J100: library part SATA_22P_HEADER, "SATA+Power connector"
J101: library part "Header 5", "Header, 5-Pin", LatestRevisionDate=17-Jul-2002, LatestRevisionNote="Re-released for DXP Platform.", Publisher="Altium Limited"
J102 J103 J104 J105 J300 J301 TP100 TP101 TP102 TP103 TP104 TP105 TP106 TP107: library part CON1, "Connector"
JP200: library part PWR2.5, "Low Voltage Power Supply Connector", Datasheet="Latest Revision: 09-May-2002", Published=17-Dec-2003, Publisher="Altium Limited"
L101 L200 L200B: library part "Inductor Iron", "Magnetic-Core Inductor", LatestRevisionDate=17-Jul-2002, LatestRevisionNote="Re-released for DXP Platform.", PackageReference=AXIAL-0.9, Published=24-Mar-1999, Publisher="Altium Limited"
P101 P102: library part "Header 2", "Header, 2-Pin", LatestRevisionDate=17-Jul-2002, LatestRevisionNote="Re-released for DXP Platform.", Publisher="Altium Limited"
P300: library part "Header 4", "Classic PC hard drive power connector, RA", LatestRevisionDate=17-Jul-2002, LatestRevisionNote="Re-released for DXP Platform.", Publisher="Altium Limited"
P301: library part "Header 5", "JST S4B-XH-A 2.5mm RA connector, stuffed in 5-pin slot, high pin aligned", LatestRevisionDate=17-Jul-2002, LatestRevisionNote="Re-released for DXP Platform.", Publisher="Altium Limited"
P302 P303: library part "Header 3", "Header, 3-Pin", LatestRevisionDate=17-Jul-2002, LatestRevisionNote="Re-released for DXP Platform.", Publisher="Altium Limited"
Q100 Q203 Q205 Q206 Q301: "Singre P-channel FET, 8A, 30V"
Q101 Q102 Q103 Q201 Q202 Q204 Q304: library part MOSFET-N, "N-Channel MOSFET", LatestRevisionDate=17-Jul-2002, LatestRevisionNote="Re-released for DXP Platform.", PackageReference=E3, PackageVersion=1995/1996, Published=8-Jun-2000, Publisher="Altium Limited"
Q200: library part MOSFET-P, "P-Channel MOSFET", LatestRevisionDate=17-Jul-2002, LatestRevisionNote="Re-released for DXP Platform.", PackageDescription="TO, Flat Index; 3 In-Line, Axial Leads; Body Dia. 4.6mm; Lead Dia. 0.5 mm (max)", PackageReference=E3, PackageVersion=1995/1996, Published=8-Jun-2000, Publisher="Altium Limited"
Q302 Q303: "Single N-channel FET, 11A, 30V"
R100 R101 R102 R103 R104 R105 R106 R107 R108 R109 R110 R111 R112 R113 R114 R115 R116 R117 R118 R119 R120 R121 R200 R201 R202 R203 R204 R205 R206 R207 R208 R209 R211 R213 R214 R215 R216 R217 R218 R219 R220 R221 R222 R223 R224 R225 R226 R300 R301 R303 R304 R305 R306 R307 R308 R309 R310 R311 R312 R313 R314 R315 R316 R317 R318 R319 R320 R321 R322 R323 R324 R325 R326 R327 R328 R329 R330 R331 R332 R333 R334 R335 R336 R337 R338 R339: library part Res1, "Resistor", LatestRevisionDate=17-Jul-2002, LatestRevisionNote="Re-released for DXP Platform.", PackageReference=AXIAL-0.3, Published=8-Jun-2000, Publisher="Altium Limited"
R210 R212 R302: library part RES_4TERM, $TOLERANCE=?, $LOCATION=RN32, $PN=#, $SEC=1, CDS_LIB=resistors, CDS_LMAN_SYM_OUTLINE=-100,25,100,-75, CDS_LOCATION=RN32, CDS_SEC=1, DRAWING=@BROWNSTONE_LIB.BROWNSTONE(SCH_1):PAGE12, LOCATION=RN32, MATERIAL=CH, MFG=OHMITE, MFG_PN=LVK12R020FER, NEEDS_NO_SIZE=TRUE, OriginalSymbolOrigin=(-100,50), PACK_TYPE=RES1206_4T, PART_NUMBER=R00034-001, PATH=I224, PHYS_PAGE=12, PN=#, ROT=1, SEC=1, TOL=1%, TOLERANCE=?, VER=1, WATTAGE=1/2W, XY=(-5650,2000)
SW100 SW101 SW300 SW301: library part "Header 4", "Chi Fung TS-1187A", LatestRevisionDate=17-Jul-2002, LatestRevisionNote="Re-released for DXP Platform.", Publisher="Altium Limited"
U100: library part STM32F103C8T6, "32-bit ARM Coretex high performance microcontroller"
U101: library part DAC081C81CIMK, "Single 8-bit DAC for I2C bus"
U102: "28V, 0.5A step-down converter with sleep mode"
U200: "SMBus-controlled battery charger with integrated FETs"
U300: library part bq77PL157A, "Voltage protection for 3-series to 6-series Li batteries"
U301: "SBS 1.1-Compliant Gas Gauge and Protection with Impedance Track (TM)"
U302: library part NTMFS4841N, "N channel power MOSFET, 30V, 57A SO-8FL"
Y100: library part XTAL, "Crystal Oscillator", LatestRevisionDate=17-Jul-2002, LatestRevisionNote="Re-released for DXP Platform.", PackageReference=R38, Published=8-Jun-2000, Publisher="Altium Limited"

## Free pads (board coordinates)
  round 78.74 hole 114.17 unplated mask+59.06: 0(688.98,748.03) 0(1574.8,1496.06) 0(2362.2,118.11) 2(4645.67,118.11)
  round 78.74 hole 106.3 unplated mask+62.99: 0(4645.67,1496.06)
  rect 98x2 on Bottom Overlay: 1(1817.97,1806.53) 1(1817.97,1808.53) 1(1817.97,1810.53) 1(1907.97,1900.53)
  rect 100x2 on Bottom Overlay: 1(1818.97,1796.53) 1(1818.97,1798.53) 1(1818.97,1800.53) 1(1818.97,1802.53) 1(1818.97,1804.53) 1(1818.97,1812.53) 1(1818.97,1814.53) 1(1818.97,1816.53) 1(1818.97,1818.53) 1(1818.97,1820.53) 1(1822.97,1828.53) 1(1992.97,1828.53) 1(1996.97,1798.53) 1(1996.97,1800.53) 1(1996.97,1802.53) 1(1996.97,1804.53) 1(1996.97,1806.53) 1(1996.97,1808.53) 1(1996.97,1810.53) 1(1996.97,1812.53) 1(1996.97,1814.53) 1(1996.97,1816.53) 1(1996.97,1818.53) 1(1996.97,1820.53)
  rect 102x2 on Bottom Overlay: 1(1819.97,1792.53) 1(1819.97,1794.53) 1(1819.97,1822.53) 1(1819.97,1824.53) 1(1819.97,1826.53) 1(1821.97,1790.53) 1(1993.97,1790.53) 1(1995.97,1792.53) 1(1995.97,1794.53) 1(1995.97,1796.53) 1(1995.97,1822.53) 1(1995.97,1824.53)
  rect 4x2 on Bottom Overlay: 1(1822.97,1918.53) 1(1864.97,1712.53) 1(1950.97,1712.53) 1(1992.97,1918.53)
  rect 6x2 on Bottom Overlay: 1(1823.97,1700.53) 1(1991.97,1700.53)
  rect 10x2 on Bottom Overlay: 1(1823.97,1702.53) 1(1823.97,1916.53) 1(1863.97,1714.53) 1(1951.97,1714.53) 1(1991.97,1702.53) 1(1991.97,1916.53)
  rect 14x2 on Bottom Overlay: 1(1823.97,1704.53) 1(1823.97,1914.53) 1(1861.97,1716.53) 1(1953.97,1716.53) 1(1991.97,1914.53)
  rect 18x2 on Bottom Overlay: 1(1823.97,1912.53)
  rect 20x2 on Bottom Overlay: 1(1824.97,1706.53) 1(1990.97,1706.53) 1(1990.97,1912.53)
  rect 24x2 on Bottom Overlay: 1(1824.97,1708.53) 1(1824.97,1910.53) 1(1990.97,1910.53)
  rect 28x2 on Bottom Overlay: 1(1824.97,1908.53)
  rect 30x2 on Bottom Overlay: 1(1825.97,1710.53) 1(1989.97,1710.53) 1(1989.97,1908.53)
  rect 34x2 on Bottom Overlay: 1(1825.97,1712.53) 1(1825.97,1906.53) 1(1907.97,1948.53) 1(1989.97,1712.53) 1(1989.97,1906.53)
  rect 38x2 on Bottom Overlay: 1(1825.97,1904.53) 1(1907.97,1942.53) 1(1907.97,1944.53) 1(1907.97,1946.53) 1(1989.97,1904.53)
  rect 40x2 on Bottom Overlay: 1(1826.97,1714.53) 1(1906.97,1940.53) 1(1988.97,1714.53)
  rect 44x2 on Bottom Overlay: 1(1826.97,1716.53) 1(1826.97,1902.53) 1(1906.97,1928.53) 1(1988.97,1716.53) 1(1988.97,1902.53)
  rect 92x2 on Bottom Overlay: 1(1826.97,1788.53) 1(1856.97,1848.53) 1(1988.97,1788.53)
  rect 48x2 on Bottom Overlay: 1(1826.97,1900.53) 1(1906.97,1918.53) 1(1988.97,1900.53)
  rect 90x2 on Bottom Overlay: 1(1827.97,1830.53) 1(1957.97,1848.53) 1(1985.97,1830.53)
  rect 84x2 on Bottom Overlay: 1(1832.97,1786.53) 1(1852.97,1846.53) 1(1962.97,1846.53) 1(1982.97,1786.53)
  rect 72x2 on Bottom Overlay: 1(1834.97,1722.53) 1(1838.97,1732.53) 1(1840.97,1736.53) 1(1840.97,1782.53) 1(1840.97,1834.53) 1(1842.97,1780.53) 1(1842.97,1836.53) 1(1850.97,1758.53) 1(1850.97,1760.53) 1(1964.97,1758.53) 1(1964.97,1760.53) 1(1970.97,1838.53) 1(1972.97,1738.53) 1(1972.97,1780.53) 1(1972.97,1782.53) 1(1972.97,1836.53) 1(1974.97,1734.53) 1(1974.97,1736.53) 1(1974.97,1834.53) 1(1976.97,1732.53) 1(1980.97,1722.53)
  rect 76x2 on Bottom Overlay: 1(1834.97,1724.53) 1(1846.97,1776.53) 1(1846.97,1842.53) 1(1850.97,1764.53) 1(1850.97,1766.53) 1(1964.97,1764.53) 1(1964.97,1766.53) 1(1968.97,1776.53) 1(1968.97,1842.53) 1(1970.97,1778.53) 1(1980.97,1724.53)
  rect 80x2 on Bottom Overlay: 1(1834.97,1832.53) 1(1848.97,1772.53) 1(1850.97,1768.53) 1(1850.97,1770.53) 1(1964.97,1768.53) 1(1964.97,1770.53) 1(1964.97,1772.53) 1(1980.97,1832.53)
  rect 66x2 on Bottom Overlay: 1(1835.97,1718.53) 1(1849.97,1752.53)
  rect 70x2 on Bottom Overlay: 1(1835.97,1720.53) 1(1841.97,1738.53) 1(1843.97,1740.53) 1(1843.97,1742.53) 1(1845.97,1744.53) 1(1847.97,1748.53) 1(1967.97,1748.53) 1(1969.97,1744.53) 1(1971.97,1740.53) 1(1971.97,1742.53) 1(1979.97,1720.53)
  rect 74x2 on Bottom Overlay: 1(1835.97,1726.53) 1(1835.97,1728.53) 1(1837.97,1730.53) 1(1839.97,1734.53) 1(1839.97,1784.53) 1(1843.97,1778.53) 1(1843.97,1838.53) 1(1845.97,1840.53) 1(1849.97,1762.53) 1(1963.97,1762.53) 1(1969.97,1840.53) 1(1975.97,1784.53) 1(1977.97,1728.53) 1(1977.97,1730.53) 1(1979.97,1726.53)
  rect 68x2 on Bottom Overlay: 1(1846.97,1746.53) 1(1848.97,1750.53) 1(1850.97,1754.53) 1(1850.97,1756.53) 1(1906.97,1906.53) 1(1964.97,1752.53) 1(1964.97,1754.53) 1(1964.97,1756.53) 1(1966.97,1750.53) 1(1968.97,1746.53) 1(1978.97,1718.53)
  rect 78x2 on Bottom Overlay: 1(1847.97,1774.53) 1(1849.97,1844.53) 1(1907.97,1904.53) 1(1965.97,1844.53) 1(1967.97,1774.53)
  rect 184x2 on Bottom Overlay: 1(1906.97,1866.53)
  rect 192x2 on Bottom Overlay: 1(1906.97,1872.53)
  rect 200x2 on Bottom Overlay: 1(1906.97,1878.53)
  rect 190x2 on Bottom Overlay: 1(1907.97,1850.53) 1(1907.97,1852.53) 1(1907.97,1870.53)
  rect 186x2 on Bottom Overlay: 1(1907.97,1854.53) 1(1907.97,1856.53) 1(1907.97,1868.53)
  rect 182x2 on Bottom Overlay: 1(1907.97,1858.53) 1(1907.97,1860.53) 1(1907.97,1862.53) 1(1907.97,1864.53)
  rect 194x2 on Bottom Overlay: 1(1907.97,1874.53)
  rect 198x2 on Bottom Overlay: 1(1907.97,1876.53)
  rect 202x2 on Bottom Overlay: 1(1907.97,1880.53)
  rect 206x2 on Bottom Overlay: 1(1907.97,1882.53)
  rect 210x2 on Bottom Overlay: 1(1907.97,1884.53) 1(1907.97,1886.53)
  rect 214x2 on Bottom Overlay: 1(1907.97,1888.53) 1(1907.97,1898.53)
  rect 218x2 on Bottom Overlay: 1(1907.97,1890.53) 1(1907.97,1892.53) 1(1907.97,1896.53)
  rect 222x2 on Bottom Overlay: 1(1907.97,1894.53)
  rect 86x2 on Bottom Overlay: 1(1907.97,1902.53)
  rect 58x2 on Bottom Overlay: 1(1907.97,1908.53)
  rect 50x2 on Bottom Overlay: 1(1907.97,1910.53) 1(1907.97,1912.53) 1(1907.97,1914.53) 1(1907.97,1916.53)
  rect 46x2 on Bottom Overlay: 1(1907.97,1920.53) 1(1907.97,1922.53) 1(1907.97,1924.53) 1(1907.97,1926.53)
  rect 42x2 on Bottom Overlay: 1(1907.97,1930.53) 1(1907.97,1932.53) 1(1907.97,1934.53) 1(1907.97,1936.53) 1(1907.97,1938.53)
  rect 26x2 on Bottom Overlay: 1(1989.97,1708.53)
  rect 16x2 on Bottom Overlay: 1(1990.97,1704.53)
  rect 104x2 on Bottom Overlay: 1(1994.97,1826.53)

## Via types
v1: diameter 20, hole 10, Top Layer to Bottom Layer, tented both sides, 200 vias
v2: diameter 30, hole 15, Top Layer to Bottom Layer, tented both sides, 156 vias
v3: diameter 25.98, hole 12.99, Top Layer to Bottom Layer, tented both sides, 10 vias

## Nets (pads, with @x,y where several pads share a name; then routed paths per layer and width w, separated by ;. In a path a pad name is that pad's centre, name@x,y a point inside that pad or via, vN(x,y) a via of type N, cw(c..) or ccw(c..) an arc to the next point about the centre after c; other vN are vias at no path point)
ACIN_GATEL: C204.1 Q205.4 R205.1 R208.2 | length 242.5
  Top Layer w10: C204.1@3952.76,326.77 3952.76,330.71 3980.32,358.27 3980.32,366.14 R205.1@4000,385.83
  Top Layer w15: C204.1@3952.76,326.77 R208.2@3952.76,279.53 3952.76,236.22 3968.31,220.67 Q205.4@4019.69,220.67
ACIN_GATER: C205.1 Q206.4 R206.2 R209.2 | length 389.1
  Top Layer w10: C205.1@3515.75,330.71 3515.75,326.77 3547.24,295.28 R209.2@3547.24,283.46 R206.2@3602.36,283.46 3602.36,94.49 3578.54,70.67 Q206.4@3527.56,70.67
ADC_IN6: J104.1 U100.16 | length 190.5
  Top Layer w6: U100.16@3854.98,1028.09 3893.17,1028.09 3901.57,1019.69 3901.57,901.57 J104.1@3885.83,885.83
ADC_IN7: J105.1 U100.17 | length 270.8
  Top Layer w6: U100.17@3854.98,1047.78 3897.1,1047.78 3917.32,1027.56 3917.32,838.58 J105.1@3909.45,830.71
ANA_METER: J102.1 P101.1 U100.14 U101.1 | length 2898.5
  Top Layer w6: v1@3827.31,988.73 U100.14@3862.85,988.73
  Top Layer w8: U101.1@1629.92,1206.69 1639.76,1196.85 v1(1677.17,1196.85) ; v1(1708.66,1118.11) 1720.47,1106.3 J102.1@1771.65,1106.3 1771.65,889.76 P101.1@1795.28,866.14
  Bottom Layer w6: P101.1@1771.65,866.14 1795.28,842.52 1795.28,749.02 1948.72,595.57 2293.64,595.57 2379.78,681.71 2533.59,681.71 2710.3,858.42 3046.17,858.42 3089.52,901.76 3125.8,901.76 3138.55,889.01 3552.87,889.01 3628.05,964.19 3720.09,964.19 3752.32,996.41 3767.72,996.41 3775.94,988.19 v1(3826.77,988.19)
  Bottom Layer w8: v1(1677.17,1196.85) 1677.17,1149.61 v1(1708.66,1118.11)
BAT_PGND: C309.2 C310.2 C311.2 J301.1 P300.2 P300.3 P301.5 R317.1 R339.2 U300.8 U302.5 U302.6 U302.7 U302.8 U302.9 | length 2151.2
  Top Layer w10: U302.9@523.62,397.74 598.62,322.74 U302.7@598.62,308.56 ; U300.8@671.26,1327.76 717.52,1327.76 724.41,1334.65 724.41,1409.45 771.65,1456.69 R339.2@771.65,1551.18
  Top Layer w15: U300.8@671.26,1327.76 671.26,1293.31 C309.2@681.1,1283.46 681.1,1251.97 688.98,1244.09 748.03,1244.09 C310.2@787.4,1283.46
  Top Layer w20: P301.5@212.6,1113.19 213.58,1112.2 R317.1@340.55,1112.2 342.52,1114.17 342.52,1137.8 362.2,1157.48 C311.2@570.87,1157.48 598.43,1157.48 637.8,1196.85 661.42,1196.85 661.42,1232.28 681.1,1251.97 ; J301.1@669.29,1192.91 J301.1@669.29,1196.85
  Top Layer w100: P300.2@352.76,578.35 P300.2@364.96,590.55
  Top Layer w125: P300.3@352.76,378.35 P300.2@352.76,578.35
  Bottom Layer w7: P300.2@352.36,578.74 P300.2@352.76,578.35
  Bottom Layer w9: 248.03,578.74 P300.2@352.36,578.74
  Bottom Layer w20: P301.5@212.6,1113.19 137.8,1038.39 137.8,629.92 188.98,578.74 248.03,578.74
BAT_PROTECTED: C207.1 C208.1 C223.2 C301.1 C302.2 D200.1 D307.1 Q203.5 Q203.6 Q203.7 Q203.8 Q303.1 Q303.2 Q303.3 Q304.2 R210.3 R304.2 R319.1 U200.20 | length 5008.4
  Top Layer w8: U200.20@2935.04,517.72 2898.87,517.72 2881.89,534.7 2881.89,598.43 2913.39,629.92 2913.39,677.17 2922.24,686.02 2932.45,686.02 2974.41,727.98 2974.41,783.46
  Top Layer w10: C301.1@1047.24,1104.33 v1(1047.24,1145.67) ; R319.1@1417.32,685.04 v1(1417.32,720.47) ; 1641.73,755.91 1641.73,864.17 1657.48,879.92 C302.2@1657.48,937.01
  Top Layer w15: v2(2326.77,425.2) 2326.77,755.91 ; v2(2622.05,78.74) D200.1@2677.17,78.74 ; D307.1@4080.71,809.06 4080.71,875.98 v2(4098.43,893.7)
  Top Layer w80: 2610.24,826.77 2637.8,854.33 3047.24,854.33
  Top Layer w100: 1472.44,909.45 1472.44,867.29 1583.83,755.91 1641.73,755.91 2326.77,755.91 2539.37,755.91 2610.24,826.77
  Bottom Layer w10: v1(1047.24,1145.67) 1311.02,1145.67 1442.91,1013.78 v1(1442.91,966.54) ; v1(1417.32,720.47) 1482.28,720.47 v1(1526.57,764.76)
  Bottom Layer w15: v2(2326.77,425.2) 2326.77,279.53 2350.39,255.91 2409.45,255.91 2500,165.35 2500,118.11 2539.37,78.74 v2(2622.05,78.74) ; v2(3106.3,862.2) 3114.17,854.33 3562.56,854.33 3614.88,906.64 3769.73,906.64 3794.36,882.01 4086.74,882.01 v2(4098.43,893.7)